# EAGLE board Motor_Driver_v00 (EAGLE 7.2.0)
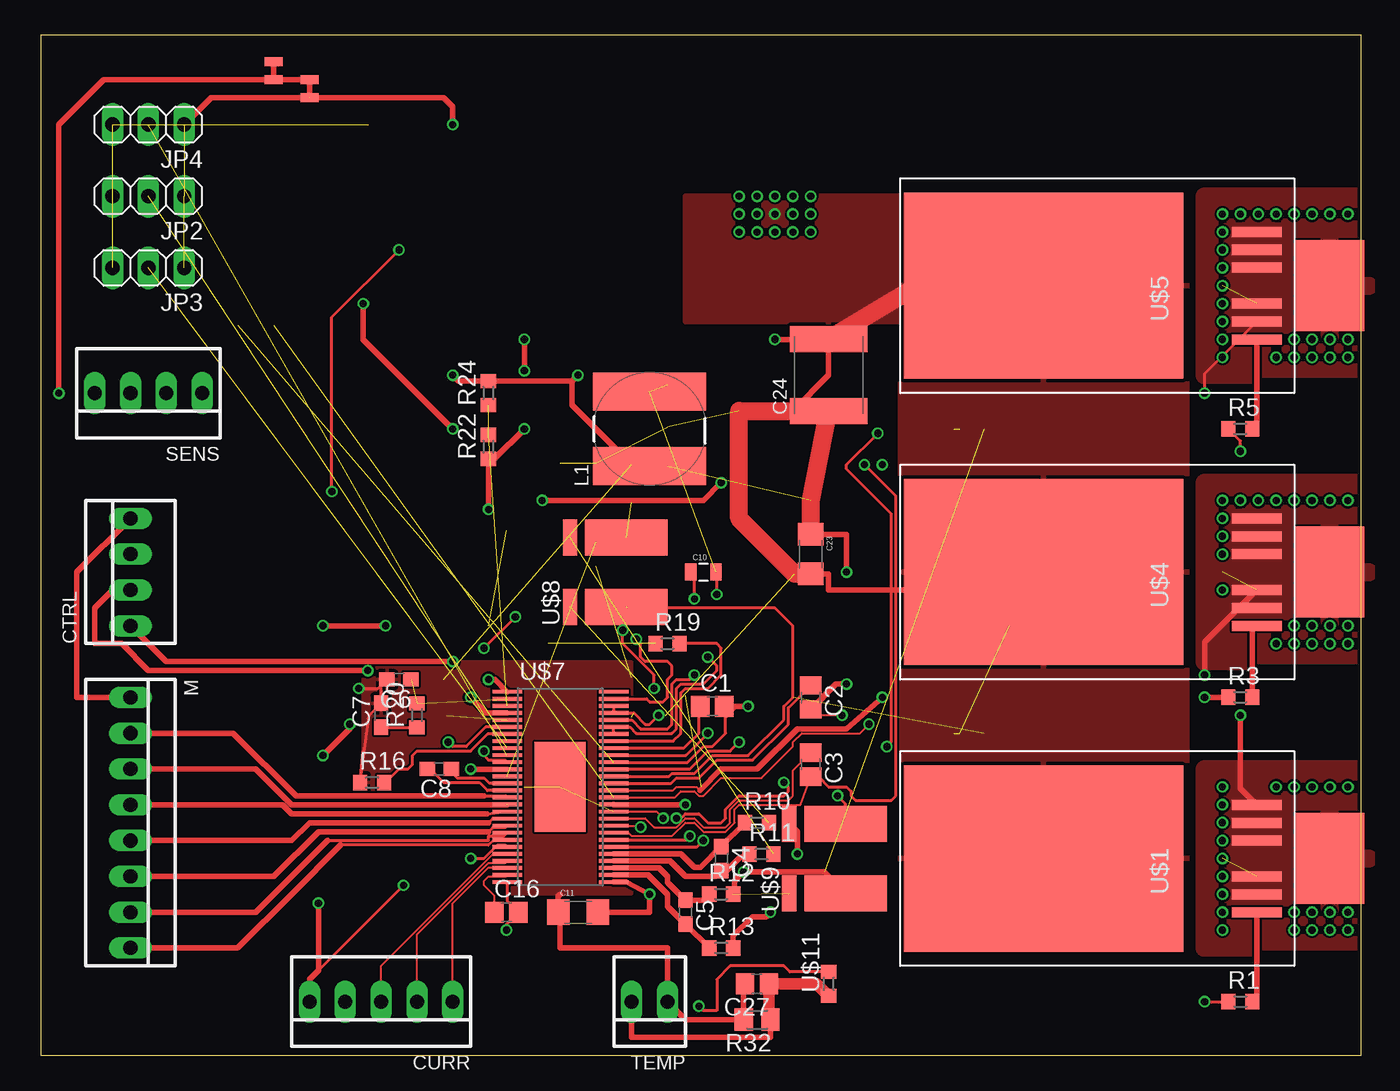
[diagram p0: board, top side]
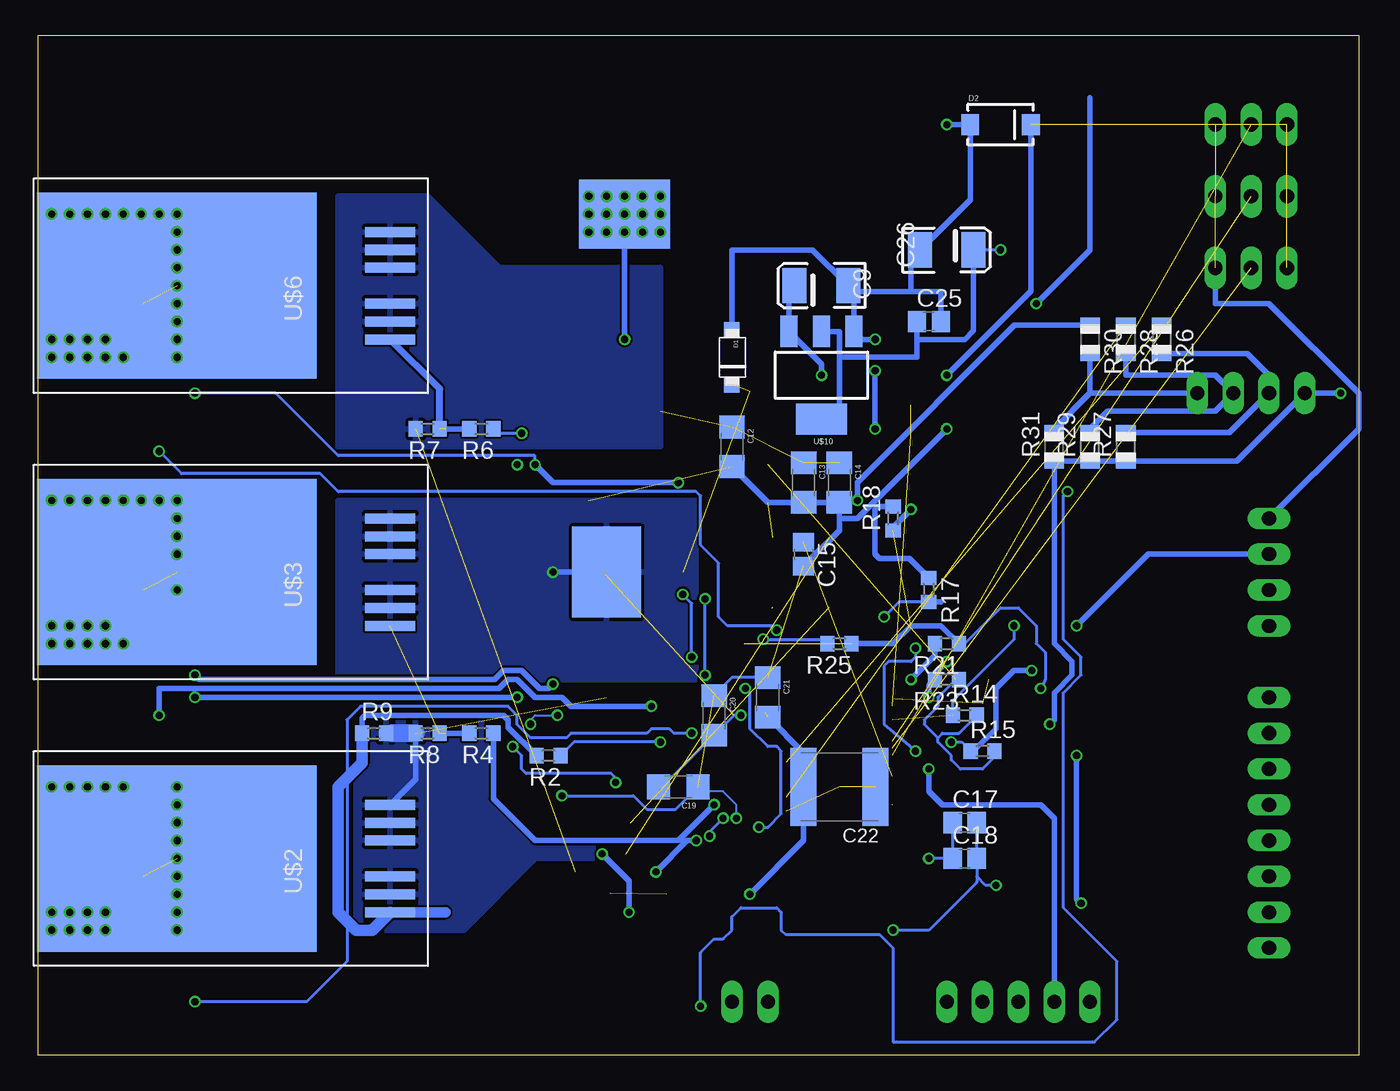
[diagram p1: board, bottom side, seen from below]

Size 93.65 x 72.38 mm. Coordinates in mm from the lower left corner, seen from the top.
Outline: 0,0 93.65,0 93.65,72.38 0,72.38 0,0
Copper layers (1*16): Top 0.035mm / dielectric 1.5mm / Bottom 0.035mm
Design rules "ITEADstudio_DRC": minimum track width 6mil, minimum drill 12mil, track to track 6mil, track to pad 6mil, pad to pad 6mil, via to via 6mil, smd to smd 0mil, copper to edge 10mil, drill to drill 10mil, minimum pad ring 10mil, minimum via ring 6mil, stop-mask expansion 2mil, vias tented up to drill 100mil, thermal gap 10mil

## Footprints (pad centres in the part's own frame; a part is rotated, then mirrored left to right if it is on the bottom)
C0805 = smd 1.3 x 1.5: 1 -0.85,0; 2 0.85,0
C0603 = smd 1.1 x 1: 1 -0.85,0; 2 0.85,0
EIA3528-KIT = smd 1.7 x 2.5: A 1.9,0; C -1.9,0
0805 = smd 0.8 x 1.2: 1 -0.9,0; 2 0.9,0
1206 = smd 1.6 x 1.8: 1 -1.4,0; 2 1.4,0
C2220K = smd 1.85 x 5.5: 1 -2.55,0; 2 2.55,0
22-23-2041 = drill 1 long: 1 -3.81,0; 2 -1.27,0; 3 1.27,0; 4 3.81,0
22-23-2051 = drill 1 long: 1 -5.08,0; 2 -2.54,0; 3 0,0; 4 2.54,0; 5 5.08,0
SOD123W = smd 1.1 x 1.1: P$1 -1.95,0; P$2 1.95,0
SMA-DIODE = smd 1.27 x 1.47: A -2.15,0; C 2.15,0
1X03 = drill 1.016 long: 1 -2.54,0; 2 0,0; 3 2.54,0
SDR0805 = smd 2.7 x 8: 1 -2.65,0; 2 2.65,0
22-23-2081 = drill 1 long: 1 -8.89,0; 2 -6.35,0; 3 -3.81,0; 4 -1.27,0; 5 1.27,0; 6 3.81,0; 7 6.35,0; 8 8.89,0
2PT_GND_TIE = smd 1.27 x 0.635: P$1 0,0.635; P$2 0,-0.635
R0603 = smd 1 x 1.1: 1 -0.85,0; 2 0.85,0
R0805 = smd 1.1 x 1.4: 1 -1,0; 2 1,0
M0805 = smd 1.3 x 1.6: 1 -0.95,0; 2 0.95,0
22-23-2021 = drill 1 long: 1 -1.27,0; 2 1.27,0
IRF7530_HEATSINK = smd 13.208 x 19.812: D1 0,1.27 | smd 0.711 x 3.556: G1 -3.81,-13.856; S1 -2.54,-13.856; S2 -1.27,-13.856; S3 1.27,-13.856; S4 2.54,-13.856; S5 3.81,-13.856
DRV8302 = smd 3.61 x 6.35: GND 0,0 | smd 2.1 x 0.27: P$1 -3.75,6.75; P$2 -3.75,6.25; P$3 -3.75,5.75; P$4 -3.75,5.25; P$5 -3.75,4.75; P$6 -3.75,4.25; P$7 -3.75,3.75; P$8 -3.75,3.25; P$9 -3.75,2.75; P$10 -3.75,2.25; P$11 -3.75,1.75; P$12 -3.75,1.25; P$13 -3.75,0.75; P$14 -3.75,0.25; P$15 -3.75,-0.25; P$16 -3.75,-0.75; P$17 -3.75,-1.25; P$18 -3.75,-1.75; P$19 -3.75,-2.25; P$20 -3.75,-2.75; P$21 -3.75,-3.25; P$22 -3.75,-3.75; P$23 -3.75,-4.25; P$24 -3.75,-4.75; P$25 -3.75,-5.25; P$26 -3.75,-5.75; P$27 -3.75,-6.25; P$28 -3.75,-6.75; P$29 3.8,-6.75; P$30 3.8,-6.25; P$31 3.8,-5.75; P$32 3.8,-5.25; P$33 3.8,-4.75; P$34 3.8,-4.25; P$35 3.8,-3.75; P$36 3.8,-3.25; P$37 3.8,-2.75; P$38 3.8,-2.25; P$39 3.8,-1.75; P$40 3.8,-1.25; P$41 3.8,-0.75; P$42 3.8,-0.25; P$43 3.8,0.25; P$44 3.8,0.75; P$45 3.8,1.25; P$46 3.8,1.75; P$47 3.8,2.25; P$48 3.8,2.75; P$49 3.8,3.25; P$50 3.8,3.75; P$51 3.8,4.25; P$52 3.8,4.75; P$53 3.8,5.25; P$54 3.8,5.75; P$55 3.8,6.25; P$56 3.8,6.75
WSLP2726 = smd 2.54 x 5.842: P$1 -2.464,-0.889; P$2 2.464,-0.889 | smd 2.54 x 1.016: P$3 -2.464,3.111; P$4 2.464,3.111
SOT223 = smd 1.219 x 2.235: 1 -2.311,-3.099; 2 0,-3.099; 3 2.311,-3.099 | smd 3.6 x 2.2: 4 0,3.099
1CONN_PAD = smd 6.452 x 4.877: P$1 0,0

## Placement (x,y rotation side)
C1  220n  [C0805]  47.62,24.77 0 top
C2  220n  [C0805]  54.61,25.4 270 top
C3  220n  [C0805]  54.61,20.64 270 top
C4  2.2n  [C0603]  48.26,13.97 270 top
C5  2.2n  [C0603]  45.72,10.16 270 top
C6  6.8nF  [C0603]  25.4,26.67 180 top
C7  120pF  [C0603]  24.13,24.13 90 top
C8  22nF  [C0603]  28.26,20.32 180 top
C9  100uF  [EIA3528-KIT]  38.1,54.61 180 bottom
C10  100nF  [0805]  46.99,34.29 0 top
C11  10u,50V  [1206]  38.1,10.16 0 top
C12  10u,50V  [1206]  44.45,43.18 270 bottom
C13  10u,50V  [1206]  39.37,40.64 270 bottom
C14  10u,50V  [1206]  36.83,40.64 270 bottom
C15  2.2u  [C0805]  39.37,35.56 270 bottom
C16  2.2u  [C0805]  33.02,10.16 0 top
C17  2.2u  [C0805]  27.94,16.51 0 bottom
C18  2.2u  [C0805]  27.94,13.97 0 bottom
C19  10u,50V  [1206]  48.26,19.05 180 bottom
C20  10u,50V  [1206]  45.72,24.13 270 bottom
C21  10u,50V  [1206]  41.91,25.4 270 bottom
C22  15u,100V  [C2220K]  36.83,19.05 180 bottom
C23  10u,50V  [1206]  54.61,35.56 270 top
C24  15u,100V  [C2220K]  55.88,48.26 90 top
C25  2.2u  [C0805]  30.48,52.07 0 bottom
C26  100uF  [EIA3528-KIT]  29.21,57.15 0 bottom
C27  2.2u  [C0805]  50.8,5.08 180 top
CTRL  22-23-2041  [22-23-2041]  6.35,34.29 90 top
CURR  22-23-2051  [22-23-2051]  24.13,3.81 180 top
D1  PMEG6020ER,115  [SOD123W]  44.45,49.53 270 bottom
D2  SMAJ5.0A  [SMA-DIODE]  25.4,66.04 0 bottom
JP2  M_PWM  [1X03]  7.62,60.96 180 top
JP3  M_OC  [1X03]  7.62,55.88 180 top
JP4  GAIN  [1X03]  7.62,66.04 180 top
L1  22uH  [SDR0805]  43.18,44.45 90 top
M  22-23-2081  [22-23-2081]  6.35,16.51 270 top
PT1  2PT_GND_TIE  [2PT_GND_TIE]  19.05,68.58 0 top
PT2  2PT_GND_TIE  [2PT_GND_TIE]  16.51,69.85 0 top
R1  4.7K  [R0603]  85.09,3.81 0 top
R2  4.7K  [R0603]  57.47,21.27 180 bottom
R3  4.7K  [R0603]  85.09,25.4 0 top
R4  4.7K  [R0603]  62.23,22.86 180 bottom
R5  4.7K  [R0603]  85.09,44.45 0 top
R6  4.7K  [R0603]  62.23,44.45 180 bottom
R7  39K  [R0603]  66.04,44.45 180 bottom
R8  39K  [R0603]  66.04,22.86 180 bottom
R9  39K  [R0603]  69.85,22.86 0 bottom
R10  100R  [R0603]  50.8,16.51 0 top
R11  100R  [R0603]  51.12,14.29 0 top
R12  100R  [R0603]  48.26,11.43 0 top
R13  100R  [R0603]  48.26,7.62 0 top
R14  10K  [R0603]  27.94,24.13 0 bottom
R15  10K  [R0603]  26.67,21.59 0 bottom
R16  10K  [R0603]  23.49,19.37 0 top
R17  270K  [R0603]  30.48,33.02 270 bottom
R18  10K  [R0603]  33.02,38.1 90 bottom
R19  1M  [R0603]  44.45,29.21 0 top
R20  15K  [R0603]  26.67,24.13 90 top
R21  220K  [R0603]  29.21,29.21 180 bottom
R22  3.3K  [R0603]  31.75,43.18 90 top
R23  10K  [R0603]  29.21,26.67 180 bottom
R24  18K  [R0603]  31.75,46.99 90 top
R25  0R  [R0603]  36.83,29.21 180 bottom
R26  39K  [R0805]  13.97,50.8 270 bottom
R27  2.2K  [R0805]  16.51,43.18 90 bottom
R28  39K  [R0805]  16.51,50.8 270 bottom
R29  2.2K  [R0805]  19.05,43.18 90 bottom
R30  39K  [R0805]  19.05,50.8 270 bottom
R31  2.2K  [R0805]  21.59,43.18 90 bottom
R32  10K  [M0805]  50.8,2.54 180 top
SENS  22-23-2041  [22-23-2041]  7.62,46.99 180 top
TEMP  22-23-2021  [22-23-2021]  43.18,3.81 180 top
U$1  IRFS7530  [IRF7530_HEATSINK]  72.39,13.97 90 top
U$2  IRFS7530  [IRF7530_HEATSINK]  82.55,13.97 90 bottom
U$3  IRFS7530  [IRF7530_HEATSINK]  82.55,34.29 90 bottom
U$4  IRFS7530  [IRF7530_HEATSINK]  72.39,34.29 90 top
U$5  IRFS7530  [IRF7530_HEATSINK]  72.39,54.61 90 top
U$6  IRFS7530  [IRF7530_HEATSINK]  82.55,54.61 90 bottom
U$7  DRV8302  [DRV8302]  36.83,19.05 0 top
U$8  WSLP2726  [WSLP2726]  40.64,34.29 90 top
U$9  WSLP2726  [WSLP2726]  56.2,13.97 90 top
U$10  TC2117  [SOT223]  38.1,48.26 180 bottom
U$11  NCP18XH103F03RB  [R0603]  55.88,5.08 90 top
U$12  1CONN_SOLDER  [1CONN_PAD]  91.44,54.61 90 top
U$13  1CONN_SOLDER  [1CONN_PAD]  91.44,34.29 90 top
U$14  1CONN_SOLDER  [1CONN_PAD]  91.44,13.97 90 top
U$15  1CONN_SOLDER  [1CONN_PAD]  52.07,59.69 0 bottom
U$16  1CONN_SOLDER  [1CONN_PAD]  53.34,34.29 270 bottom

## Library data of the parts
C1-C8 C15-C18 C25 C27 R1-R32 = adafruit
C9 C26 = SparkFun-Capacitors
C10-C14 C19-C21 C23 PT1 PT2 = SparkFun-Passives
C22 C24 = resistor
CTRL SENS = con-molex; MF: MOLEX; MPN: 22-23-2041; OC_FARNELL: 1462920; OC_NEWARK: 38C0355
CURR = con-molex; MF: MOLEX; MPN: 22-23-2051; OC_FARNELL: 1462952; OC_NEWARK: 38C9178
D1 = nxp
D2 = SparkFun-DiscreteSemi
JP2-JP4 = pinhead
L1 = bourne
M = con-molex; MF: MOLEX; MPN: 22-23-2081; OC_FARNELL: 1756826; OC_NEWARK: 01C7592
TEMP = con-molex; MF: MOLEX; MPN: 22-23-2021; OC_FARNELL: 1462926; OC_NEWARK: 25C3832
U$1-U$16 = bldc_lib

## Nets
+3V3: C25.1 C26.A U$10.2 U$10.4 U$11.2
+5V: C9.A D2.C JP2.3 JP3.3 JP4.3 L1.1 R14.2 R15.2 R23.1 R24.2 U$10.3
AGND: C16.2 C17.2 C18.2 CURR.5 PT2.P$2 R27.1 R29.1 R31.1 SENS.4 U$7.P$28
DC_CAL: CURR.4 U$7.P$12
DGND: C6.2 C7.2 C9.C C11.1 C25.2 C26.C C27.2 CTRL.4 D1.P$1 D2.A JP2.1 JP3.1 JP4.1 M.1 PT1.P$2 R16.1 R18.1 R19.1 R21.1 R22.1 R25.1 R32.2 TEMP.1 U$10.1
DVDD: R17.1 R18.2
EN_GATE: M.2 U$7.P$16
FAULT: CTRL.2 R15.1 U$7.P$6
GAIN: JP4.2 U$7.P$10
GH_A: R1.1 U$7.P$47
GH_B: R3.1 U$7.P$42
GH_C: R5.1 U$7.P$37
GL_A: R2.1 U$7.P$45
GL_B: R4.1 U$7.P$40
GL_C: R6.1 U$7.P$35
GND: C12.2 C13.2 C14.2 C15.2 C19.1 C20.1 C21.1 C22.1 C23.1 C24.1 PT1.P$1 PT2.P$1 U$3.S1 U$3.S2 U$3.S3 U$3.S4 U$3.S5 U$7.GND U$7.P$39 U$8.P$2 U$9.P$2 U$16.P$1
H1: M.3 U$7.P$17
H1_LOW: R8.2 R9.2 U$2.S1 U$2.S2 U$2.S3 U$2.S4 U$2.S5 U$7.P$44 U$8.P$1
H1_VS: C1.2 R26.1 U$1.S1 U$1.S2 U$1.S3 U$1.S4 U$1.S5 U$2.D1 U$7.P$46 U$14.P$1
H2: M.5 U$7.P$19
H2_VS: C2.2 R28.1 U$3.D1 U$4.S1 U$4.S2 U$4.S3 U$4.S4 U$4.S5 U$7.P$41 U$13.P$1
H3: M.7 U$7.P$21
H3_LOW: R7.2 U$6.S1 U$6.S2 U$6.S3 U$6.S4 U$6.S5 U$7.P$34 U$9.P$1
H3_VS: C3.2 R30.1 U$5.S1 U$5.S2 U$5.S3 U$5.S4 U$5.S5 U$6.D1 U$7.P$36 U$12.P$1
L1: M.4 U$7.P$18
L2: M.6 U$7.P$20
L3: M.8 U$7.P$22
M_OC: JP3.2 U$7.P$9
M_PWM: JP2.2 U$7.P$8
N$1: R1.2 U$1.G1
N$2: R2.2 R9.1 U$2.G1
N$3: R4.2 R8.1 U$3.G1
N$4: R3.2 U$4.G1
N$5: R5.2 U$5.G1
N$6: R6.2 R7.1 U$6.G1
N$7: C1.1 U$7.P$48
N$8: R17.2 U$7.P$11
N$10: C8.1 U$7.P$14
N$11: C5.2 R13.1 U$7.P$30
N$12: C2.1 U$7.P$43
N$13: C8.2 U$7.P$15
N$14: C7.1 R20.1
N$15: R21.2 U$7.P$1
N$16: R16.2 U$7.P$7
N$17: R25.2 U$7.P$55
N$18: C15.1 U$7.P$13
N$19: C10.2 D1.P$2 L1.2 U$7.P$50 U$7.P$51
N$20: C6.1 R20.2 U$7.P$2
N$21: R19.2 U$7.P$49
N$22: C4.1 R10.1 U$7.P$33
N$23: C4.2 R11.1 U$7.P$32
N$24: C5.1 R12.1 U$7.P$31
N$26: C3.1 U$7.P$38
N$27: C16.1 U$7.P$27
N$28: R22.2 R24.1 U$7.P$3
N$29: C10.1 U$7.P$52
N$30: C17.1 C18.1 U$7.P$23
N$124: R12.2 U$9.P$3
N$126: R10.2 U$8.P$3
N$127: R11.2 U$8.P$4
N$128: R13.2 U$9.P$4
OCTW: CTRL.3 R14.1 U$7.P$5
PWRGD: CTRL.1 R23.2 U$7.P$4
REF: CURR.3 U$7.P$24
SENS1: R26.2 R27.2 SENS.3
SENS2: R28.2 R29.2 SENS.2
SENS3: R30.2 R31.2 SENS.1
SO1: CURR.2 U$7.P$25
SO2: CURR.1 U$7.P$26
TEMP: C27.1 R32.1 TEMP.2 U$11.1
VCC: C11.2 C12.1 C13.1 C14.1 C19.2 C20.2 C21.2 C22.2 C23.2 C24.2 U$1.D1 U$4.D1 U$5.D1 U$7.P$29 U$7.P$53 U$7.P$54 U$15.P$1

## Tracks (layer width: path | path; a pad name or v marks a point on that pad's centre or on a via)
+3V3  (via drill 0.51 pad 0.51)
  Top 0.203: U$11.2 53.12,5.93 52.7,6.35 48.89,6.35 47.94,5.4 47.94,3.17 46.99,3.17 v46.67,3.49 | v20.64,40.01 20.64,52.39 v25.4,57.15
  Bottom 0.203: v46.67,3.49 46.67,7.3 45.72,8.26 45.09,8.26 44.45,8.89 44.45,9.84 43.81,10.48 41.27,10.48 40.96,10.16 40.96,8.89 40.64,8.57 33.97,8.57 33.02,7.62 33.02,0.95 18.73,0.95 17.15,2.54 17.15,6.67 20.95,10.48 20.95,25.72 19.69,26.99 19.69,28.26 20.95,29.53 20.95,39.69 v20.64,40.01 | v25.4,57.15 C26.A
  Bottom 0.406: U$10.2 36.83,51.36 36.83,49.53 | 36.83,49.53 31.33,49.53 C25.1 31.33,50.8 27.94,50.8 27.31,51.43 C26.A | 37.39,44.45 37.74,44.81 | 37.74,44.81 U$10.4 | 36.83,49.53 36.83,45.72 37.74,44.81
+5V  (via drill 0.51 pad 0.51)  (4 unrouted)
  Top 0.406: v29.21,48.26 29.63,47.84 R24.2 37.68,47.84 | 37.68,47.84 v38.1,48.26 | 37.68,47.84 37.68,46.14 41.91,41.91 43.07,41.91 L1.1
  Bottom 0.203: R15.2 25.82,21.17 26.67,20.32 28.26,20.32 28.89,20.95 28.89,21.27 29.84,22.23 29.84,22.54 | 29.84,22.54 29.53,22.86 28.36,22.86 R14.2 | R23.1 28.57,26.67 29.84,25.4 29.84,24.77 30.8,23.81 30.8,23.5 29.84,22.54
  Bottom 0.406: C9.A 40.41,54.2 U$10.3 38.1,49.05 v38.1,48.26 | D2.C 23.25,54.22 v29.21,48.26
AGND  (via drill 0.51 pad 0.51)
  Top 0.203: U$7.P$28 33.08,10.95 C16.2 33.02,9.31 v33.02,8.89 | CURR.5 19.05,5.4 v25.72,12.06
  Top 0.406: v1.27,46.99 1.27,66.04 4.45,69.22 PT2.P$2 | v21.91,23.5 21.91,23.18 v20,21.27 | v19.69,10.79 19.69,6.03 19.05,5.4
  Bottom 0.203: v33.02,8.89 30.48,8.89 27.09,12.28 27.09,12.7 | C17.2 C18.2 27.09,12.7 | v25.72,12.06 26.45,12.06 27.09,12.7
  Bottom 0.406: v1.27,46.99 SENS.4 8.62,42.18 R27.1 R29.1 R31.1 21.59,29.21 20.32,27.94 20.32,26.99 21.59,25.72 21.59,23.81 v21.91,23.5 | v20,21.27 20,11.11 v19.69,10.79
DC_CAL  (via drill 0.51 pad 0.51)
  Top 0.406: U$7.P$12 30.5,20.3 v30.48,20.32
  Bottom 0.406: CURR.4 21.59,16.83 22.54,17.78 29.53,17.78 30.48,18.73 v30.48,20.32
DGND  (via drill 0.51 pad 0.51)  (4 unrouted)
  Top 0.203: 22.86,21.59 R16.1 23.28,24.13 C7.2 24.13,26.25 | v22.54,26.04 23.91,26.04 C6.2
  Top 0.406: JP4.1 12.06,67.94 PT1.P$2 28.57,67.94 29.21,67.31 v29.21,66.04 | M.1 2.54,25.4 2.54,34.29 CTRL.4 | v31.75,38.73 R22.1 32.17,42.33 v34.29,44.45 | v34.29,48.58 v34.29,50.8 | C27.2 49.85,4.98 R32.2 45.72,2.54 TEMP.1 44.45,7.62 36.83,7.62 36.83,10.16 C11.1 36.7,11.3 36.83,11.43
  Bottom 0.203: R21.1 27.94,29.21 25.4,31.75 24.13,31.75 22.86,30.48 22.86,29.21 22.23,28.57 22.23,26.67 v22.54,26.04
  Bottom 0.406: 35.79,54.2 U$10.1 35.23,50.8 v34.29,50.8 | 35.79,54.2 C9.C 38.74,57.15 44.45,57.15 D1.P$1 | 35.79,54.2 31.75,54.2 | 31.75,54.2 29.63,54.2 C25.2 | 31.75,54.2 31.75,57.15 C26.C 27.55,60.71 D2.A v29.21,66.04 | JP3.1 10.16,53.34 6.35,53.34 0,46.99 0,44.45 CTRL.4 | R18.1 33.02,37.47 v31.75,38.73 | R25.1 33.02,29.21 31.75,30.48 29.63,30.48 R21.1 | v34.29,44.45 v34.29,48.58
  pour Top: 22.86,27.94 41.91,27.94 41.91,11.43 22.86,11.43
DVDD
  Bottom 0.406: R18.2 34.07,38.95 34.29,38.73 34.29,35.56 33.97,35.24 31.85,35.24 R17.1
EN_GATE
  Top 0.203: 31.43,18.41 32.96,18.41 U$7.P$16
  Top 0.406: M.2 13.65,22.86 18.1,18.41 31.43,18.41
FAULT  (via drill 0.51 pad 0.51)
  Top 0.203: U$7.P$6 31.55,23.3 30.16,21.91 29.21,21.91 v28.89,22.23
  Top 0.406: CTRL.2 5.08,33.02 3.81,31.75 3.81,29.21 5.71,29.21 7.62,27.3 v23.18,27.3
  Bottom 0.203: v28.89,22.23 28.16,22.23 R15.1
  Bottom 0.406: R15.1 27.3,21.59 25.72,23.18 25.72,26.04 24.45,27.3 v23.18,27.3
GAIN  (1 unrouted)
GH_A  (via drill 0.51 pad 0.51)
  Top 0.203: U$7.P$47 45.75,21.3 v47.31,22.86 | v82.55,3.81 R1.1
  Bottom 0.203: v47.31,22.86 48.58,22.86 48.89,23.18 50.16,23.18 50.48,22.86 55.88,22.86 56.2,22.54 58.74,22.54 59.69,23.5 59.69,24.13 60.32,24.77 70.8,24.77 71.76,23.81 71.76,6.67 74.61,3.81 v82.55,3.81
GH_B  (via drill 0.51 pad 0.51)
  Top 0.152: U$7.P$42 44.84,18.8 45.09,19.05 46.49,19.05 46.74,18.8
  Top 0.406: R3.1 v82.55,25.4 | 46.74,18.8 48.26,20.32 50.8,20.32 53.66,23.18 57.15,23.18 v59.69,25.4
  Bottom 0.406: v59.69,25.4 v82.55,25.4
GH_C  (via drill 0.51 pad 0.51)
  Top 0.152: U$7.P$37 42.44,16.3 v42.55,16.19
  Top 0.203: v43.5,26.04 43.5,26.99 41.27,29.21 v41.27,30.16 | 84.46,44.23 R5.1 85.09,43.6 v85.09,42.86
  Bottom 0.203: v42.55,16.19 41.91,16.19 40.96,17.14 40.96,21.59 41.27,21.91 41.91,21.91 43.18,23.18 43.18,25.72 v43.5,26.04 | v41.27,30.16 41.59,30.48 44.77,30.48 45.4,31.11 45.4,34.92 46.67,36.2 46.67,39.69 46.99,40.01 72.39,40.01 73.66,41.27 83.5,41.27 v85.09,42.86
GL_A  (via drill 0.51 pad 0.51)
  Top 0.203: U$7.P$45 40.65,20.32 46.04,20.32 47.31,21.59 48.89,21.59 v49.53,22.23
  Bottom 0.203: v49.53,22.23 55.66,22.23 R2.1
GL_B  (via drill 0.51 pad 0.51)
  Top 0.406: 40.63,17.78 U$7.P$40 40.65,17.78 v45.72,17.78
  Bottom 0.406: R4.1 61.38,18.2 58.42,15.24 48.26,15.24 v45.72,17.78
GL_C  (via drill 0.51 pad 0.51)
  Top 0.203: U$7.P$35 45.78,15.3 v46.04,15.56 | v45.09,16.83 45.4,16.83 45.72,17.14 46.67,17.14 47.31,16.51 48.26,16.51 48.58,16.83 48.58,17.46 49.53,18.41 52.7,18.41 53.02,18.73 53.02,19.05 v52.7,19.37 | v60.01,21.91 60.32,22.23 60.32,38.42 57.15,41.59 57.15,41.91 v59.37,44.13
  Bottom 0.203: v46.04,15.56 46.04,15.88 v45.09,16.83 | v52.7,19.37 52.7,19.68 53.02,20 59.05,20 59.37,20.32 59.37,21.27 v60.01,21.91 | v59.37,44.13 61.06,44.13 R6.1
GND  (via drill 0.51 pad 0.51)  (7 unrouted)
  Top 0.152: U$7.P$39 43.66,17.3 v44.13,16.83
  Top 0.203: U$9.P$2 57.09,17.84 v56.52,18.41
  Top 0.406: 16.51,69.22 PT1.P$1 19.05,68.58 | v22.86,53.34 22.86,50.8 v29.21,44.45 | C23.1 57.15,36.96 v57.15,34.29
  Top 1.27: C23.1 54.61,39.36 C24.1
  Bottom 0.152: v44.13,16.83 44.13,17.78 45.09,18.73 46.54,18.73 C19.1
  Bottom 0.203: C21.1 44.45,26.8 C20.1 | v56.52,18.41 51.43,18.41 50.48,17.46 48.45,17.46 C19.1
  Bottom 0.406: C12.2 41.91,39.24 C13.2 C14.2 36.83,38.1 | 36.83,38.1 36.83,37.25 C15.2 | 19.05,67.94 19.05,57.15 v22.86,53.34 | v29.21,44.45 35.56,38.1 36.83,38.1 | v57.15,34.29 U$16.P$1
  pour Bottom: 72.39,39.37 46.99,39.37 46.99,26.67 72.39,26.67
H1  (1 unrouted)
  Top 0.406: M.3 15.24,20.32 17.78,17.78 33.06,17.78
H1_LOW  (2 unrouted)
  Top 0.203: U$7.P$44 44.56,19.8 44.77,20 46.35,20 47.62,21.27 50.16,21.27 52.7,23.81 52.7,24.77 53.34,25.4 53.34,30.48 52.07,31.75 41.6,31.75
  Bottom 0.406: R8.2 66.89,19.58 U$2.S5
  Bottom 1.27: R8.2 68.58,22.86
  pour Bottom: 46.99,24.13 71.12,24.13 71.12,8.89 63.5,8.89 58.42,13.97 46.99,13.97
H1_VS  (via drill 0.51 pad 0.51)  (2 unrouted)
  Top 0.203: U$7.P$46 45.88,20.8 46.99,21.91 47.62,21.91 48.58,22.86 48.58,24.13 48.58,24.66 C1.2
  Top 0.406: v50.16,24.77 49.21,24.77 48.58,24.13 | v85.09,24.13 85.09,18.94 U$1.S5
  Bottom 0.406: v50.16,24.77 55.88,24.77 56.52,25.4 58.42,25.4 59.69,26.67 60.32,26.67 60.96,26.04 85.09,26.04 v85.09,24.13
  pour Top: 82.55,20.32 93.98,20.32 93.98,7.62 82.55,7.62
H2
  Top 0.203: 31.75,16.51 32.07,16.83 33.05,16.83 U$7.P$19
  Top 0.406: M.5 17.78,15.24 19.05,16.51 31.75,16.51
H2_VS  (via drill 0.51 pad 0.51)  (2 unrouted)
  Top 0.152: U$7.P$41 44.97,18.3 45.4,18.73 46.35,18.73 46.67,18.41 46.99,18.41 48.26,19.68 51.12,19.68 53.34,21.91 53.34,22.23 53.98,22.86 58.1,22.86 v58.74,23.5 | 54.51,24.45 C2.2 55.03,24.13 v56.83,24.13
  Top 0.406: v57.15,26.35 56.41,26.35 C2.2 | U$4.S2 82.55,29.32 v82.55,26.99
  Bottom 0.152: v58.74,23.5 58.74,23.81 58.42,24.13 v56.83,24.13
  Bottom 0.406: v57.15,26.35 57.47,26.04 58.1,26.04 59.37,27.3 60.64,27.3 61.28,26.67 82.23,26.67 v82.55,26.99
  pour Top: 82.55,40.64 93.98,40.64 93.98,27.94 82.55,27.94
H3
  Top 0.203: 20.32,15.24 31.43,15.24 31.75,15.24 31.75,15.56 32.84,15.56 U$7.P$21
  Top 0.406: M.7 15.24,10.16 20.32,15.24
H3_LOW  (via drill 0.51 pad 0.51)  (1 unrouted)
  Top 0.203: U$7.P$34 46.55,14.8 v46.99,15.24
  Top 0.406: 49.21,11.53 49.21,12.38 v49.85,13.02 55.57,13.02 U$9.P$1
  Bottom 0.406: v46.99,15.24 47.62,15.24 v49.85,13.02
  pour Bottom: 72.39,43.18 49.53,43.18 49.53,55.88 60.96,55.88 66.04,60.96 72.39,60.96
H3_VS  (via drill 0.51 pad 0.51)  (1 unrouted)
  Top 0.152: C3.2 53.87,17.78 49.53,17.78 49.21,17.46 49.21,16.51 48.58,15.88 46.99,15.88 46.35,16.51 45.72,16.51 44.77,15.56 41.91,15.56 41.67,15.8 U$7.P$36
  Top 0.203: v82.55,46.99 82.55,48.37 U$5.S1 | C3.2 55.14,19.79 55.88,19.05 57.15,19.05 57.47,18.73 57.47,18.41 57.79,18.1 60.32,18.1 60.64,18.41 60.64,39.69 v58.42,41.91
  Top 0.406: v35.56,39.37 46.99,39.37 v48.26,40.64
  Bottom 0.203: v58.42,41.91 58.42,42.55 72.39,42.55 76.84,46.99 v82.55,46.99
  Bottom 0.406: R30.1 24.4,51.8 35.56,40.64 v35.56,39.37 | v48.26,40.64 57.15,40.64 v58.42,41.91
  pour Top: 82.55,60.96 93.98,60.96 93.98,48.26 82.55,48.26
L1
  Top 0.203: 31.66,17.14 U$7.P$18
  Top 0.406: M.4 17.15,17.78 17.78,17.14 31.66,17.14
L2
  Top 0.203: 31.75,15.88 32.07,16.19 32.97,16.19 U$7.P$20
  Top 0.406: M.6 16.51,12.7 19.69,15.88 31.75,15.88
L3
  Top 0.203: U$7.P$22 32.13,15.3 31.75,14.92 21.27,14.92
  Top 0.406: M.8 13.97,7.62 17.78,11.43 21.27,14.92
M_OC  (1 unrouted)
M_PWM  (1 unrouted)
N$1
  Top 0.406: U$1.G1 86.25,4.12 R1.2
N$2
  Bottom 0.406: R2.2 60.32,23.28 60.32,23.81 60.64,24.13 70.48,24.13 70.7,23.91 R9.1
  Bottom 0.762: U$2.G1 64.77,10.16
  Bottom 0.813: R9.1 70.7,20.74 72.39,19.05 72.39,10.16 71.12,8.89 69.96,8.89 U$2.G1
N$3  (2 unrouted)
  Bottom 0.406: R4.2 64.77,22.86
N$4
  Top 0.406: R3.2 85.94,30.17 U$4.G1
N$5
  Top 0.406: U$5.G1 86.25,44.76 R5.2
N$6  (1 unrouted)
  Bottom 0.406: R6.2 64.77,44.45
  Bottom 0.508: R7.1 65.19,47.3 U$6.G1
N$7
  Top 0.203: U$7.P$48 45.61,21.8 46.67,22.86 46.67,24.66 C1.1
N$8  (via drill 0.51 pad 0.51)
  Top 0.203: v31.43,21.59 31.43,21.27 31.75,20.95 32.92,20.95 U$7.P$11 | v33.66,31.11 v31.43,28.89
  Bottom 0.203: 29.63,32.17 32.6,32.17 v33.66,31.11 | v31.43,21.59 33.66,23.5 33.66,27.62 33.34,27.94 31.75,27.94 31.43,28.26 v31.43,28.89
  Bottom 0.406: R17.2 29.63,32.17
N$10
  Top 0.203: U$7.P$14 31.82,19.3 31.43,19.68 29.53,19.68 29.11,20.11 C8.1
N$11
  Top 0.406: R13.1 C5.2 44.45,10.58 44.45,11.43 43.08,12.8 U$7.P$30
N$12
  Top 0.203: U$7.P$43 44.7,19.3 45.09,19.68 46.67,19.68 47.94,20.95 50.48,20.95 53.02,23.5 53.02,24.66 C2.1
N$13
  Top 0.203: U$7.P$15 31.68,18.8 31.12,19.37 28.57,19.37 27.62,20.32 C8.2
N$14
  Top 0.203: C7.1 R20.1
N$15  (via drill 0.51 pad 0.51)
  Top 0.406: v31.75,26.67 32.21,26.67 U$7.P$1
  Bottom 0.406: R21.2 30.06,28.36 v31.75,26.67
N$16
  Top 0.203: U$7.P$7 31.69,22.8 30.48,21.59 26.67,21.59 26.35,21.27 26.35,20.64 26.03,20.32 25.4,20.32 24.45,19.37 R16.2
N$17  (via drill 0.51 pad 0.51)
  Top 0.203: U$7.P$55 42.96,25.3 43.18,25.08 44.13,25.08 44.45,25.4 44.45,26.67 44.77,26.99 44.77,27.62 44.45,27.94 42.86,27.94 42.55,28.26 42.55,29.21 v42.23,29.53
  Bottom 0.203: v42.23,29.53 38,29.53 R25.2
N$18  (1 unrouted)
N$19  (via drill 0.51 pad 0.51)  (2 unrouted)
  Top 0.203: U$7.P$50 U$7.P$51 41.79,23.3 42.23,22.86 44.77,22.86 45.09,23.18 45.09,26.04 45.4,26.35 46.99,26.35 47.94,27.3 47.94,27.62 v47.31,28.26 | v47.94,32.7 47.94,34.24 C10.2
  Bottom 0.203: v47.31,28.26 47.31,32.07 v47.94,32.7
N$20  (2 unrouted)
N$21
  Top 0.203: U$7.P$49 44.84,22.3 45.4,22.86 45.4,25.72 45.72,26.04 47.31,26.04 48.26,26.99 48.26,28.89 47.94,29.21 R19.2
N$22
  Top 0.406: U$7.P$33 40.64,14.29 45.4,14.29 46.35,13.34 46.77,13.34 C4.1 R10.1
N$23
  Top 0.406: R11.1 49.53,13.97 48.68,13.12 C4.2 47.84,12.7 45.72,12.7 44.62,13.8 U$7.P$32
N$24
  Top 0.406: U$7.P$31 43.85,13.3 44.45,12.7 44.45,12.28 C5.1 46.99,11.01 R12.1
N$25  (via drill 0.51 pad 0.51)
  other vias: 49.53,60.96
N$26
  Top 0.152: U$7.P$38 40.66,16.83 42.86,16.83 43.5,16.19 45.09,16.19 45.72,16.83 46.35,16.83 46.99,16.19 48.58,16.19 48.89,16.51 48.89,17.46 49.53,18.1 53.02,18.1 53.34,18.41 53.34,20.22 C3.1
N$27
  Top 0.152: C16.1 32.17,11.33 31.43,12.06 31.43,12.38 31.75,12.7 32.98,12.7 U$7.P$27
N$28  (2 unrouted)
N$29  (via drill 0.51 pad 0.51)
  Top 0.203: U$7.P$52 41.92,23.8 42.55,23.18 44.45,23.18 44.77,23.5 44.77,26.35 45.09,26.67 46.04,26.67 v46.35,26.99 | v46.35,32.38 46.35,34.02 C10.1
  Bottom 0.203: v46.35,26.99 v46.35,32.38
N$30  (via drill 0.51 pad 0.51)
  Top 0.203: U$7.P$23 32.96,14.92 32.38,14.92 31.43,13.97 v30.48,13.97
  Bottom 0.203: C17.1 C18.1 v30.48,13.97
N$31  (via drill 0.51 pad 0.51)
  other vias: 50.8,60.96
N$32  (via drill 0.51 pad 0.51)
  other vias: 52.07,60.96
N$33  (via drill 0.51 pad 0.51)
  other vias: 53.34,58.42
N$34  (via drill 0.51 pad 0.51)
  other vias: 54.61,58.42
N$35  (via drill 0.51 pad 0.51)
  other vias: 54.61,60.96
N$36  (via drill 0.51 pad 0.51)
  other vias: 53.34,60.96
N$37  (via drill 0.51 pad 0.51)
  other vias: 50.8,59.69
N$38  (via drill 0.51 pad 0.51)
  other vias: 49.53,59.69
N$39  (via drill 0.51 pad 0.51)
  other vias: 49.53,58.42
N$40  (via drill 0.51 pad 0.51)
  other vias: 50.8,58.42
N$41  (via drill 0.51 pad 0.51)
  other vias: 52.07,58.42
N$42  (via drill 0.51 pad 0.51)
  other vias: 53.34,59.69
N$43
  pour Top: 82.55,60.96 93.98,60.96 93.98,48.26 82.55,48.26
N$44  (via drill 0.51 pad 0.51)
  other vias: 83.82,39.37
N$45  (via drill 0.51 pad 0.51)
  other vias: 83.82,10.16
N$46  (via drill 0.51 pad 0.51)
  other vias: 83.82,8.89
N$47  (via drill 0.51 pad 0.51)
  other vias: 85.09,39.37
N$48  (via drill 0.51 pad 0.51)
  other vias: 86.36,39.37
N$49  (via drill 0.51 pad 0.51)
  other vias: 87.63,39.37
N$50  (via drill 0.51 pad 0.51)
  other vias: 88.9,39.37
N$51  (via drill 0.51 pad 0.51)
  other vias: 90.17,39.37
N$52  (via drill 0.51 pad 0.51)
  other vias: 91.44,39.37
N$53  (via drill 0.51 pad 0.51)
  other vias: 92.71,39.37
N$54  (via drill 0.51 pad 0.51)
  other vias: 83.82,38.1
N$55  (via drill 0.51 pad 0.51)
  other vias: 83.82,36.83
N$56  (via drill 0.51 pad 0.51)
  other vias: 83.82,35.56
N$58  (via drill 0.51 pad 0.51)
  other vias: 83.82,33.02
N$60  (via drill 0.51 pad 0.51)
  other vias: 54.61,59.69
N$61  (via drill 0.51 pad 0.51)
  other vias: 88.9,8.89
N$62  (via drill 0.51 pad 0.51)
  other vias: 90.17,8.89
N$63  (via drill 0.51 pad 0.51)
  other vias: 91.44,8.89
N$64  (via drill 0.51 pad 0.51)
  other vias: 83.82,19.05
N$67  (via drill 0.51 pad 0.51)
  other vias: 87.63,19.05
N$68  (via drill 0.51 pad 0.51)
  other vias: 88.9,19.05
N$69  (via drill 0.51 pad 0.51)
  other vias: 90.17,19.05
N$70  (via drill 0.51 pad 0.51)
  other vias: 91.44,19.05
N$71  (via drill 0.51 pad 0.51)
  other vias: 92.71,19.05
N$72  (via drill 0.51 pad 0.51)
  other vias: 83.82,17.78
N$73  (via drill 0.51 pad 0.51)
  other vias: 83.82,16.51
N$74  (via drill 0.51 pad 0.51)
  other vias: 83.82,15.24
N$75  (via drill 0.51 pad 0.51)
  other vias: 83.82,13.97
N$76  (via drill 0.51 pad 0.51)
  other vias: 83.82,12.7
N$77  (via drill 0.51 pad 0.51)
  other vias: 83.82,11.43
N$78  (via drill 0.51 pad 0.51)
  other vias: 92.71,8.89
N$79  (via drill 0.51 pad 0.51)
  other vias: 92.71,10.16
N$80  (via drill 0.51 pad 0.51)
  other vias: 91.44,10.16
N$81  (via drill 0.51 pad 0.51)
  other vias: 90.17,10.16
N$82  (via drill 0.51 pad 0.51)
  other vias: 83.82,59.69
N$83  (via drill 0.51 pad 0.51)
  other vias: 85.09,59.69
N$84  (via drill 0.51 pad 0.51)
  other vias: 86.36,59.69
N$85  (via drill 0.51 pad 0.51)
  other vias: 87.63,59.69
N$86  (via drill 0.51 pad 0.51)
  other vias: 88.9,59.69
N$87  (via drill 0.51 pad 0.51)
  other vias: 90.17,59.69
N$88  (via drill 0.51 pad 0.51)
  other vias: 91.44,59.69
N$89  (via drill 0.51 pad 0.51)
  other vias: 92.71,59.69
N$90  (via drill 0.51 pad 0.51)
  other vias: 83.82,58.42
N$91  (via drill 0.51 pad 0.51)
  other vias: 83.82,57.15
N$92  (via drill 0.51 pad 0.51)
  other vias: 83.82,55.88
N$93  (via drill 0.51 pad 0.51)
  other vias: 83.82,54.61
N$94  (via drill 0.51 pad 0.51)
  other vias: 83.82,53.34
N$95  (via drill 0.51 pad 0.51)
  other vias: 83.82,52.07
N$96  (via drill 0.51 pad 0.51)
  other vias: 88.9,10.16
N$100  (via drill 0.51 pad 0.51)
  other vias: 83.82,50.8
N$101  (via drill 0.51 pad 0.51)
  other vias: 83.82,49.53
N$104  (via drill 0.51 pad 0.51)
  other vias: 87.63,49.53
N$105  (via drill 0.51 pad 0.51)
  other vias: 88.9,49.53
N$106  (via drill 0.51 pad 0.51)
  other vias: 90.17,49.53
N$107  (via drill 0.51 pad 0.51)
  other vias: 91.44,49.53
N$108  (via drill 0.51 pad 0.51)
  other vias: 92.71,49.53
N$109  (via drill 0.51 pad 0.51)
  other vias: 87.63,29.21
N$110  (via drill 0.51 pad 0.51)
  other vias: 88.9,29.21
N$111  (via drill 0.51 pad 0.51)
  other vias: 90.17,29.21
N$112  (via drill 0.51 pad 0.51)
  other vias: 91.44,29.21
N$113  (via drill 0.51 pad 0.51)
  other vias: 92.71,29.21
N$114  (via drill 0.51 pad 0.51)
  other vias: 88.9,30.48
N$115  (via drill 0.51 pad 0.51)
  other vias: 90.17,30.48
N$116  (via drill 0.51 pad 0.51)
  other vias: 91.44,30.48
N$117  (via drill 0.51 pad 0.51)
  other vias: 92.71,30.48
N$118  (via drill 0.51 pad 0.51)
  other vias: 88.9,50.8
N$119  (via drill 0.51 pad 0.51)
  other vias: 90.17,50.8
N$120  (via drill 0.51 pad 0.51)
  other vias: 91.44,50.8
N$121  (via drill 0.51 pad 0.51)
  other vias: 92.71,50.8
N$122
  pour Top: 82.55,40.64 93.98,40.64 93.98,27.94 82.55,27.94
N$123  (via drill 0.51 pad 0.51)
  other vias: 59.69,41.91
N$124  (1 unrouted)
N$125
  pour Top: 82.55,20.32 93.98,20.32 93.98,7.62 82.55,7.62
N$126  (1 unrouted)
N$127  (1 unrouted)
N$128  (via drill 0.51 pad 0.51)
  Top 0.406: R13.2 49.11,8.47 50.48,9.84 51.43,9.84 v51.75,10.16 | v53.66,14.29 53.66,15.86 U$9.P$4
  Bottom 0.406: v51.75,10.16 51.75,12.38 v53.66,14.29
OCTW  (via drill 0.51 pad 0.51)  (1 unrouted)
  Top 0.406: v20,30.48 v24.45,30.48
  Bottom 0.203: R14.1 28.79,25.18 24.45,29.53 v24.45,30.48
  Bottom 0.406: CTRL.3 14.92,35.56 v20,30.48
PWRGD  (via drill 0.51 pad 0.51)
  Top 0.406: U$7.P$4 31.58,24.3 v30.48,25.4 | v29.21,27.94 8.89,27.94 CTRL.1
  Bottom 0.406: v30.48,25.4 30.48,26.25 R23.2 30.06,27.09 v29.21,27.94
REF
  Top 0.152: CURR.3 24.13,6.35 32.07,14.29 33.02,14.29 33.03,14.3 U$7.P$24
SENS1
  Bottom 0.406: R26.2 7.89,49.8 6.35,48.26 SENS.3 9.16,44.18 R27.2
SENS2
  Bottom 0.406: R28.2 16.51,48.26 10.16,48.26 SENS.2 10.16,45.72 17.78,45.72 19.05,44.45 R29.2
SENS3
  Bottom 0.406: R30.2 19.05,46.99 | 19.05,46.99 SENS.1 | R31.2 21.59,44.45 19.05,46.99
SO1
  Top 0.152: CURR.2 26.67,8.57 31.75,13.65 32.93,13.65 U$7.P$25
SO2
  Top 0.152: CURR.1 29.21,10.79 31.75,13.34 33.05,13.34 U$7.P$26
TEMP
  Top 0.406: 51.65,2.64 R32.1 51.75,1.27 41.91,1.27 TEMP.2
  Top 0.813: U$11.1 55.03,5.08 C27.1 51.65,2.64
VCC  (via drill 0.51 pad 0.51)  (5 unrouted)
  Top 0.203: v43.81,24.13 43.18,23.5 42.86,23.5 42.06,24.3 U$7.P$53 U$7.P$54
  Top 0.406: U$7.P$29 41.51,12.3 v43.18,11.43 43.18,10.16 C11.2 | 53.34,45.72 55.88,48.26 C24.2 v52.07,50.8 | C23.2 55.88,34.16 55.88,33.02 71.12,33.02 U$4.D1
  Top 1.27: U$5.D1 62.22,54.61 C24.2 | C23.2 53.47,34.16 49.53,38.1 49.53,45.72 53.34,45.72
  Bottom 0.203: v43.81,24.13 44.32,24.13 C20.2 49.4,19.05 C19.2
  Bottom 0.406: v43.18,11.43 39.37,15.24 C22.2 39.38,21.47 C21.2 | U$15.P$1 v52.07,50.8
  other vias: 52.07,59.69
  pour Top: 60.96,7.62 81.28,7.62 81.28,60.96 45.72,60.96 45.72,52.07 60.96,52.07